# EAGLE board gate (EAGLE 9.3.2)
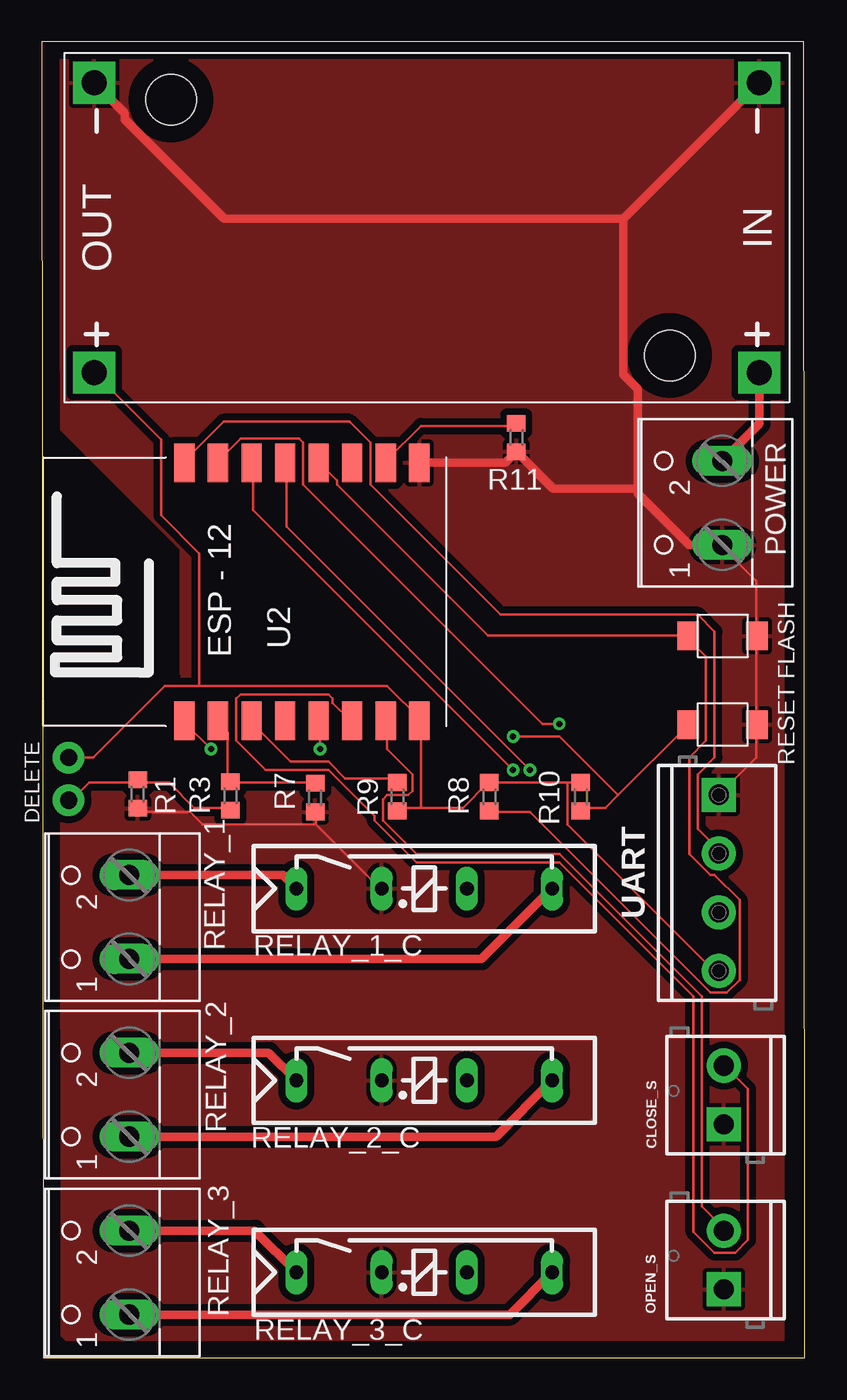
[diagram p0: board, top side]
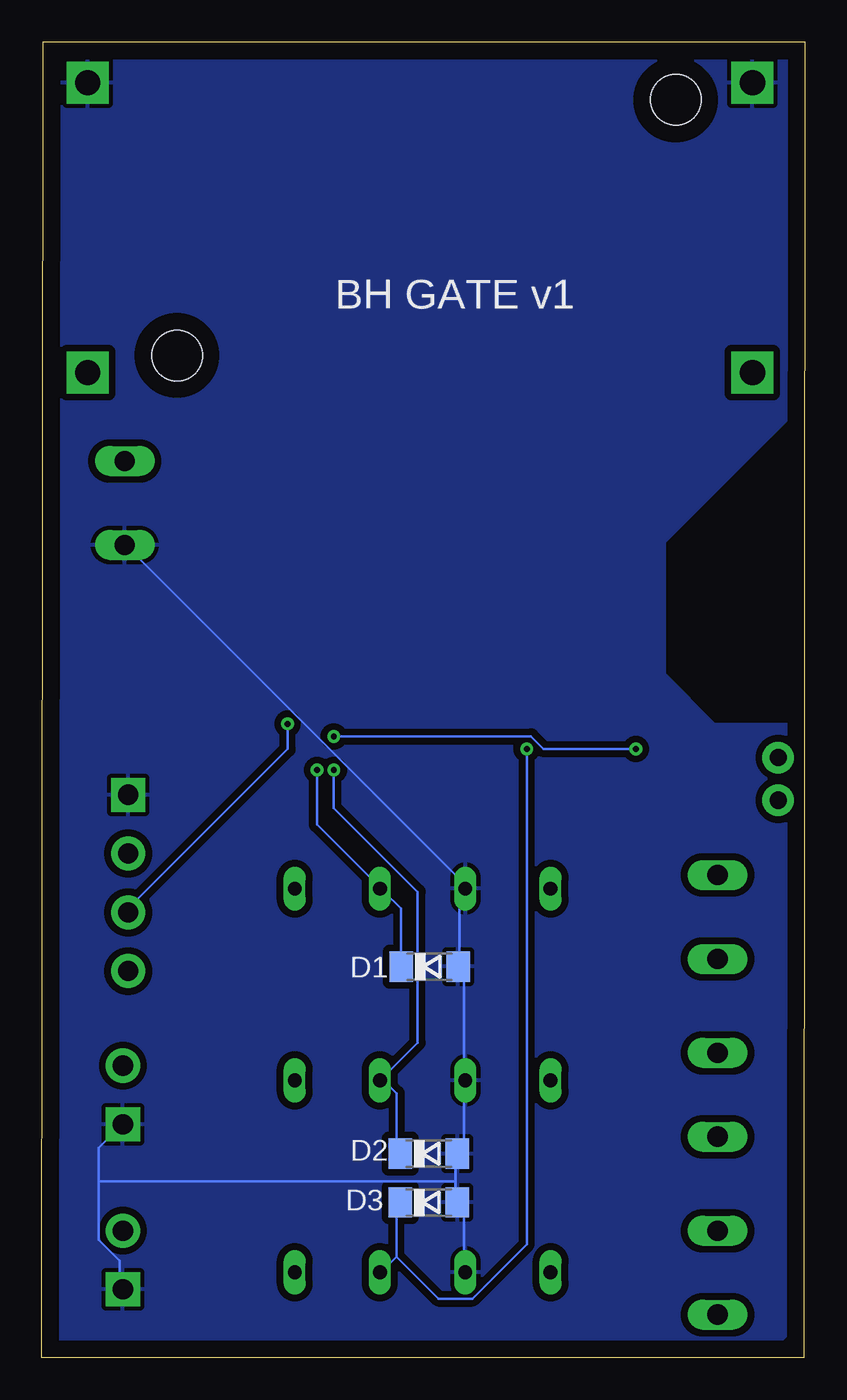
[diagram p1: board, bottom side, seen from below]

Size 45.46 x 78.37 mm. Coordinates in mm from the lower left corner, seen from the top.
Outline: 0.07,0 45.46,0 45.39,78.37 0,78.37 0.07,0
Copper layers (1*16): Top 0.035mm / dielectric 1.5mm / Bottom 0.035mm
Design rules "default": minimum track width 6mil, minimum drill 0.35mm, track to track 6mil, track to pad 6mil, pad to pad 6mil, via to via 6mil, smd to smd 6mil, copper to edge 40mil, drill to drill 6mil, minimum pad ring 10mil, minimum via ring 8mil, stop-mask expansion 4mil, vias tented up to drill 0mil, thermal gap 10mil
Net classes: 1 220V: width 1.27 mm, clearance 2 mm

## Footprints (pad centres in the part's own frame; a part is rotated, then mirrored left to right if it is on the bottom)
SCREWTERMINAL-3.5MM-2 = drill 1.2 pad 2.032 square: 1 0,0 | drill 1.2 pad 2.032: 2 3.5,0
SOD80C = smd 1.4 x 1.8: A 1.7,0; C -1.7,0
B3U-1000P = smd 1.283 x 1.7: 1 -2.056,0; 2 2.056,0
1X02 = drill 1.016 pad 1.88: 1 -1.27,0; 2 1.27,0
W237-102 = drill 1.194 long: 1 -2.5,-1.27; 2 2.5,-1.27
R0603 = smd 1 x 1.1: 1 -0.85,0; 2 0.85,0
REED = drill 0.813 long: 1 -17.78,2.54; 3 -12.7,2.54; 5 -7.62,2.54; 7 -2.54,2.54
ESP12-SMD = smd 2.286 x 1.2: ADC -7.792,3.8; CH_PD -7.792,1.8; GND 7.592,-8.2; GPIO0 7.592,-2.2; GPIO2 7.592,-4.2; GPIO4 7.592,-0.2; GPIO5 7.592,1.8; GPIO12 -7.792,-4.2; GPIO13 -7.792,-6.2; GPIO14 -7.792,-2.2; GPIO15 7.592,-6.2; GPIO16 -7.792,-0.2; RESET -7.792,5.8; RXD0 7.592,3.8; TXD0 7.592,5.8; VCC -7.792,-8.2
DC-DC-STEP-DOWN-LM2596 = drill 1.5 pad 2.5 square: IN+ -19.812,8.636; IN- -19.812,-8.636; OUT+ 19.812,8.636; OUT- 19.812,-8.636 | hole 3: -14.478,7.62; 15.24,-7.62
SCREWTERMINAL-3.5MM-4 = drill 1.2 pad 2.032 square: 1 0,0 | drill 1.2 pad 2.032: 2 3.5,0; 3 7,0; 4 10.5,0

## Placement (x,y rotation side)
CLOSE_S  [SCREWTERMINAL-3.5MM-2]  40.64,13.89 90 top
D1  1N4148  [SOD80C]  22.37,23.29 0 bottom
D2  1N4148  [SOD80C]  22.42,12.15 0 bottom
D3  1N4148  [SOD80C]  22.42,9.24 0 bottom
FLASH  B3U-1000P-2P-SMD  [B3U-1000P]  40.56,42.99 0 top
LDR  LDR-TH  [1X02]  1.59,34.47 90 top
OPEN_S  [SCREWTERMINAL-3.5MM-2]  40.64,4.06 90 top
POWER  [W237-102]  39.26,50.92 90 top
R1  10k  [R0603]  5.71,33.57 270 top
R3  220k  [R0603]  11.23,33.46 270 top
R7  100k  [R0603]  16.28,33.36 90 top
R8  10k  [R0603]  26.66,33.41 90 top
R9  10k  [R0603]  21.18,33.41 270 top
R10  10k  [R0603]  32.11,33.41 90 top
R11  10k  [R0603]  28.27,54.81 270 top
RELAY_1  [W237-102]  3.94,26.24 90 top
RELAY_1_C  REED  [REED]  32.94,25.4 0 top
RELAY_2  [W237-102]  3.94,15.66 90 top
RELAY_2_C  REED  [REED]  32.94,13.97 0 top
RELAY_3  [W237-102]  3.94,5.06 90 top
RELAY_3_C  REED  [REED]  32.94,2.54 0 top
RESET  B3U-1000P-2P-SMD  [B3U-1000P]  40.56,37.7 0 top
U2  esp12  [ESP12-SMD]  14.28,45.72 90 top
U$1  DC-DC-STEP-DOWN-LM2596  [DC-DC-STEP-DOWN-LM2596]  22.93,67.31 180 top
UART  [SCREWTERMINAL-3.5MM-4]  40.33,33.52 270 top

## Library data of the parts
CLOSE_S OPEN_S = SparkFun-Connectors; PROD_ID: CONN-08399
D1-D3 = diode
FLASH = switches; DIGIKEY: SW1020CT-ND; MANUFACTURER: Omron; MPN: B3U-1000P; SPICEPREFIX: F
LDR = kanflo
POWER RELAY_1-RELAY_3 = con-wago-500; MPN: 237-102; OC_FARNELL: unknown; OC_NEWARK: 70K9898
R1 R3 R7-R11 = resistor
RELAY_1_C RELAY_2_C RELAY_3_C = relay; OC_FARNELL: unknown; OC_NEWARK: unknown
RESET = switches; DIGIKEY: SW1020CT-ND; MANUFACTURER: Omron; MPN: B3U-1000P
U2 = esp8266modules
U$1 = diy-modules
UART = SparkFun-Connectors; PROD_ID: 2xCONN-08399; SF_ID: 2xPRT-08084

## Nets
3V3: LDR.2 R8.2 R9.2 R10.2 U2.VCC U$1.OUT+ UART.4
A0: LDR.1 R1.1 R3.2
ADC: R3.1 R7.2 U2.ADC
CH_PD: R9.1 U2.CH_PD
GND: CLOSE_S.1 D1.A D2.A D3.A FLASH.2 OPEN_S.1 POWER.1 R1.2 R7.1 R11.2 RELAY_1_C.3 RELAY_2_C.3 RELAY_3_C.3 RESET.2 U2.GND U$1.IN- U$1.OUT- UART.1
GND1: RELAY_1.1 RELAY_1_C.7
GND2: RELAY_2.1 RELAY_2_C.7
GND3: RELAY_3.1 RELAY_3_C.7
GPIO0: FLASH.1 R8.1 U2.GPIO0
GPIO02: U2.GPIO2
GPIO04: D1.C RELAY_1_C.5 U2.GPIO4
GPIO05: D2.C RELAY_2_C.5 U2.GPIO5
GPIO12: CLOSE_S.2 U2.GPIO12
GPIO13: OPEN_S.2 U2.GPIO13
GPIO14: D3.C RELAY_3_C.5 U2.GPIO14
GPIO15: R11.1 U2.GPIO15
GPIO16: U2.GPIO16
N$1: RELAY_1.2 RELAY_1_C.1
N$2: RELAY_2.2 RELAY_2_C.1
N$3: RELAY_3.2 RELAY_3_C.1
N$17: POWER.2 U$1.IN+
RESET: R10.1 RESET.1 U2.RESET
RX: U2.RXD0 UART.3
TX: U2.TXD0 UART.2

## Tracks (layer width: path | path; a pad name or v marks a point on that pad's centre or on a via)
3V3
  Top 0.152: 22.57,32.75 25.07,32.75 26.57,34.25 R8.2 26.82,34.25 31.32,34.25 | 22.57,32.75 21.32,32.75 R9.2 | 31.32,34.25 32.07,34.25 R10.2 | 22.57,32.75 22.57,37.75 U2.VCC 22.57,38 20.57,40 9.38,40 | 31.32,34.25 31.32,31.75 39.82,23.25 40.32,23.25 UART.4 | 9.38,40 7.32,40 3.06,35.74 LDR.2 | U$1.OUT+ 7.11,54.69 7.11,50.18 9.38,47.91 9.38,40
A0
  Top 0.152: LDR.1 1.82,33.25 2.82,34.25 5.57,34.25 R1.1 5.82,34.25 7.57,34.25 9.07,32.75 11.07,32.75 R3.2
ADC
  Top 0.152: U2.ADC 10.57,37.75 11.07,37.25 11.07,34.5 R3.1 11.32,34.25 16.07,34.25 R7.2
CH_PD
  Top 0.152: R9.1 21.07,34.5 18.07,34.5 17.07,35.5 14.82,35.5 12.57,37.75 U2.CH_PD
GND
  Top 0.152: UART.1 40.57,33.75 42.57,35.75 42.57,37.5 RESET.2 42.57,37.75 42.57,42.75 FLASH.2 42.57,43 42.57,46.25 40.57,48.25 POWER.1 | 16.32,31.75 16.32,32.5 R7.1 | 16.32,31.75 20.07,28 RELAY_1_C.3 | 16.32,31.75 9.57,31.75 8.82,32.5 5.82,32.5 R1.2
  Top 0.508: 35.5,51.78 35.5,57.69 34.64,58.54 34.64,67.84 | 35.5,51.78 35.5,51.48 38.56,48.42 POWER.1 | U$1.IN- 34.64,67.84 | 35.5,51.78 30.44,51.78 R11.2 27.62,53.31 U2.GND | U$1.OUT- 4.92,74.14 4.92,73.78 10.86,67.84 34.64,67.84
  Bottom 0.152: 42.07,10.5 42.07,12.5 40.82,13.75 CLOSE_S.1 | 42.07,10.5 42.07,7 40.82,5.75 40.82,4.25 OPEN_S.1 | 20.82,10.5 20.82,12 D2.A 20.57,12.25 20.32,12.5 20.32,16.5 RELAY_2_C.3 20.32,16.75 20.32,23 20.57,23.25 D1.A 20.57,23.5 20.57,27.5 20.32,27.75 RELAY_1_C.3 20.07,28 40.32,48.25 POWER.1 | 20.82,10.5 20.82,9.25 D3.A 20.57,9 20.32,8.75 20.32,5.25 RELAY_3_C.3 | 20.82,10.5 42.07,10.5
  pour Top (isolate 0.406): 0.57,77.81 0.57,55.83 8.26,48.15 8.26,40.75 8.36,40.65 5.16,37.46 0.47,37.46 0.47,2 1.97,0.5 43.68,0.5 44.18,1 44.18,77.31 43.58,77.91 1.07,77.91 0.67,77.51
  pour Bottom (isolate 0.406): 0.57,77.71 44.18,77.71 44.38,77.51 44.38,0.7 44.48,0.6 1.77,0.6 0.57,1.8 0.57,37.26 1.07,37.76 5.36,37.76 8.36,40.75 8.36,48.54 0.86,56.04 -0.03,56.04 -0.03,77.11
GND1
  Top 0.508: RELAY_1.1 26.2,23.74 RELAY_1_C.7
GND2
  Top 0.508: RELAY_2.1 27.05,13.16 RELAY_2_C.7
GND3
  Top 0.508: RELAY_3.1 27.88,2.56 RELAY_3_C.7
GPIO0
  Top 0.152: R8.1 26.82,32.5 29.07,32.5 39.82,21.75 40.82,21.75 41.57,22.5 41.57,27.25 40.07,28.75 39.82,28.75 38.57,30 38.57,35.75 39.57,36.75 39.57,41.75 38.57,42.75 FLASH.1 38.32,43 26.57,43 17.57,52 17.57,52.25 16.57,53.25 U2.GPIO0
GPIO04  (via drill 0.35)
  Top 0.152: v29.07,35 14.57,49.5 14.57,53.25 U2.GPIO4
  Bottom 0.152: D1.C 24.07,23.5 24.07,26.75 25.07,27.75 RELAY_1_C.5 25.32,28 29.07,31.75 v29.07,35
GPIO05  (via drill 0.35)
  Top 0.152: v28.07,35 12.57,50.5 12.57,53.25 U2.GPIO5
  Bottom 0.152: D2.C 24.32,12.25 24.32,15.75 25.07,16.5 RELAY_2_C.5 25.07,16.75 23.07,18.75 23.07,27.75 28.07,32.75 v28.07,35
GPIO12
  Top 0.152: U2.GPIO12 18.32,38 17.32,39 17.32,39.25 17.07,39.5 11.82,39.5 11.57,39.25 11.57,36.75 13.32,35 17.07,35 19.82,32.25 19.82,32 22.32,29.5 30.82,29.5 38.82,21.5 38.82,7.5 40.07,6.25 41.32,6.25 42.07,7 42.07,16 40.82,17.25 CLOSE_S.2
GPIO13
  Top 0.152: U2.GPIO13 20.57,37.75 20.57,36.25 22.07,34.75 22.07,33.75 21.82,33.5 20.57,33.5 20.32,33.25 20.32,32 22.32,30 30.82,30 39.32,21.5 39.32,9 40.57,7.75 OPEN_S.2
GPIO14  (via drill 0.35)
  Top 0.152: v16.57,36.25 16.57,37.75 U2.GPIO14
  Bottom 0.152: 24.32,6 24.32,9 D3.C | 24.32,6 25.07,5.25 RELAY_3_C.5 | v16.57,36.25 16.57,6.75 19.82,3.5 21.82,3.5 24.32,6
GPIO15
  Top 0.152: R11.1 28.07,55.5 22.57,55.5 20.57,53.5 U2.GPIO15
N$1
  Top 0.508: RELAY_1.2 14.36,28.74 RELAY_1_C.1
N$2
  Top 0.508: RELAY_2.2 13.51,18.16 RELAY_2_C.1
N$3
  Top 0.508: RELAY_3.2 12.68,7.56 RELAY_3_C.1
N$17
  Top 0.508: U$1.IN+ 42.75,55.63 POWER.2
RESET  (via drill 0.35)
  Top 0.152: 34.32,33.5 38.32,37.5 RESET.1 | 34.32,33.5 33.57,32.75 32.32,32.75 R10.1 | v10.07,36.25 8.57,37.75 U2.RESET | v28.07,37 30.82,37 34.32,33.5
  Bottom 0.152: v10.07,36.25 15.57,36.25 16.32,37 v28.07,37
RX  (via drill 0.35)
  Top 0.152: v30.82,37.75 29.82,37.75 15.57,52 15.57,54.5 15.32,54.75 11.82,54.75 10.57,53.5 U2.RXD0
  Bottom 0.152: v30.82,37.75 30.82,36.25 40.32,26.75 UART.3
TX
  Top 0.152: U2.TXD0 8.57,53.5 10.82,55.75 18.32,55.75 19.57,54.5 19.57,52 27.32,44.25 39.07,44.25 40.07,43.25 40.07,35.75 39.07,34.75 39.07,31.5 40.32,30.25 UART.2

## Text on the board
bNames: BH GATE v1